# Altium PCB PCB1.PcbDoc
Units mm, origin at the board's own origin, x right, y up, seen from the top; angles counter-clockwise.
Board outline 24.26 x 18.8 mm, 2 copper layers (Top Layer, Bottom Layer); 19 components, 11 nets, 52 pads, 13 vias.
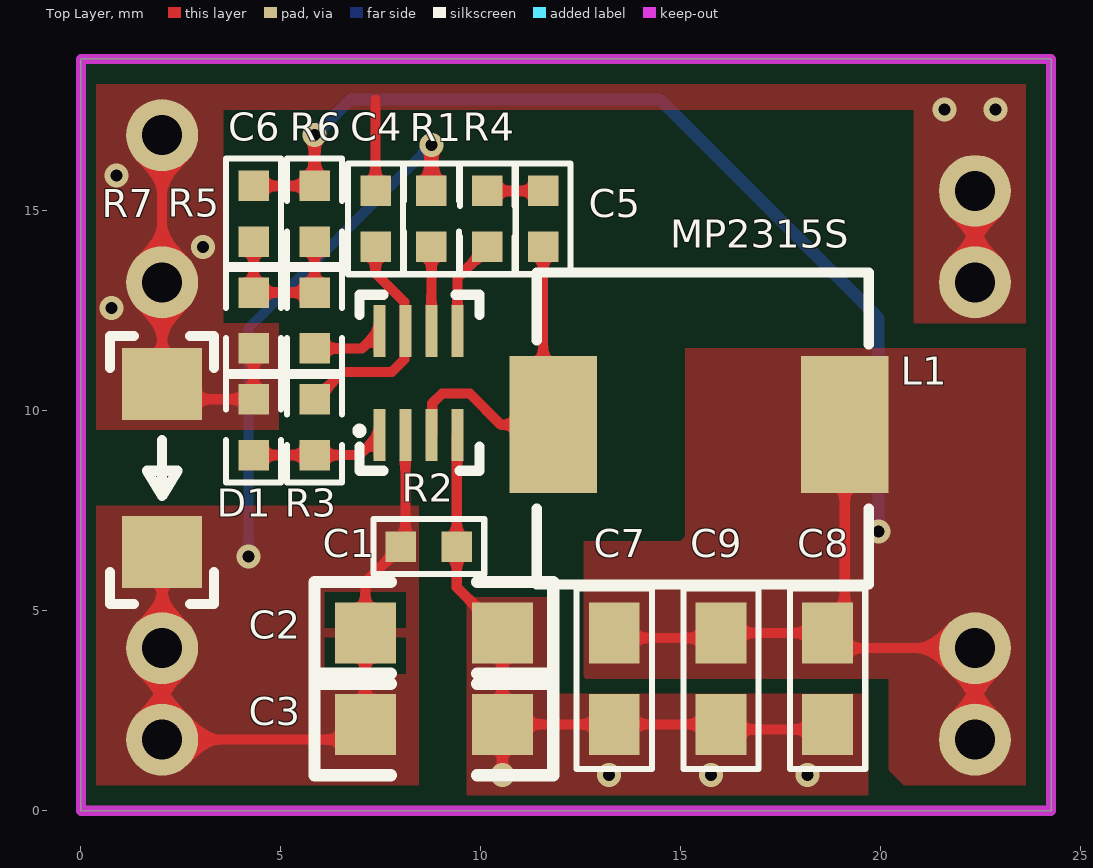
[diagram p0: Top Layer view]
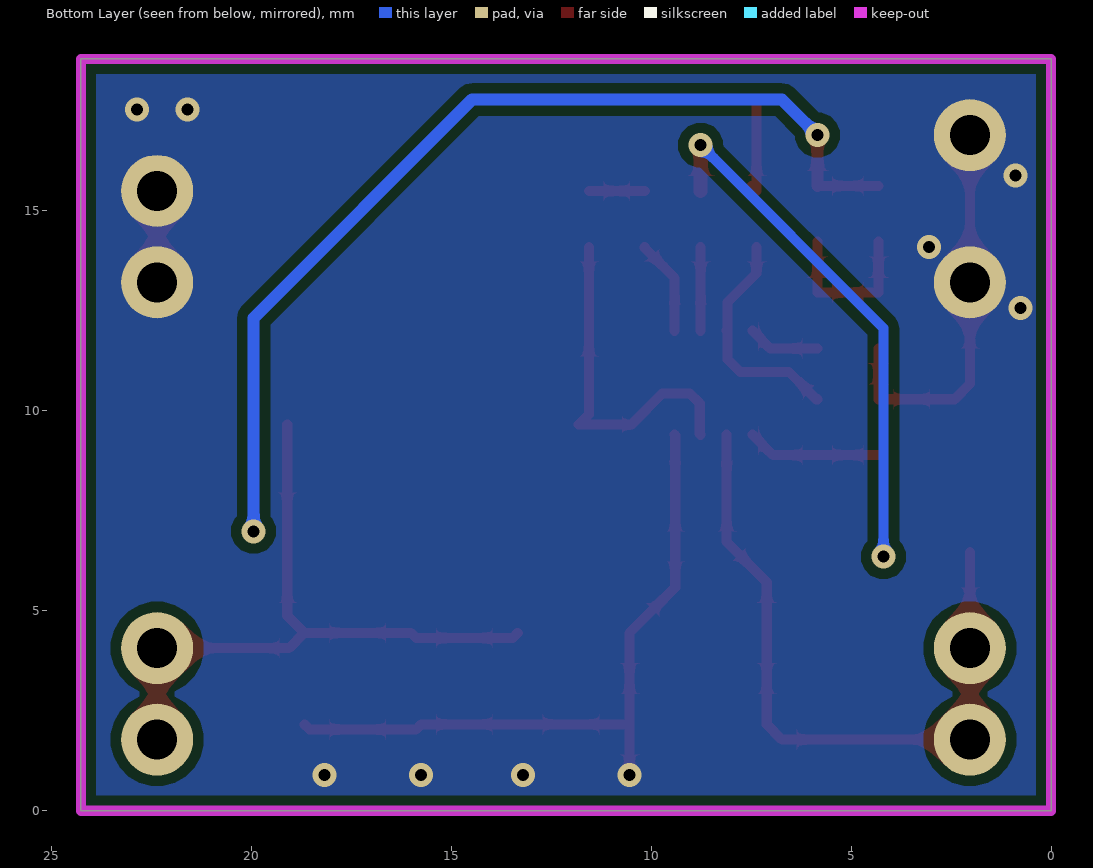
[diagram p1: Bottom Layer view, seen from below]
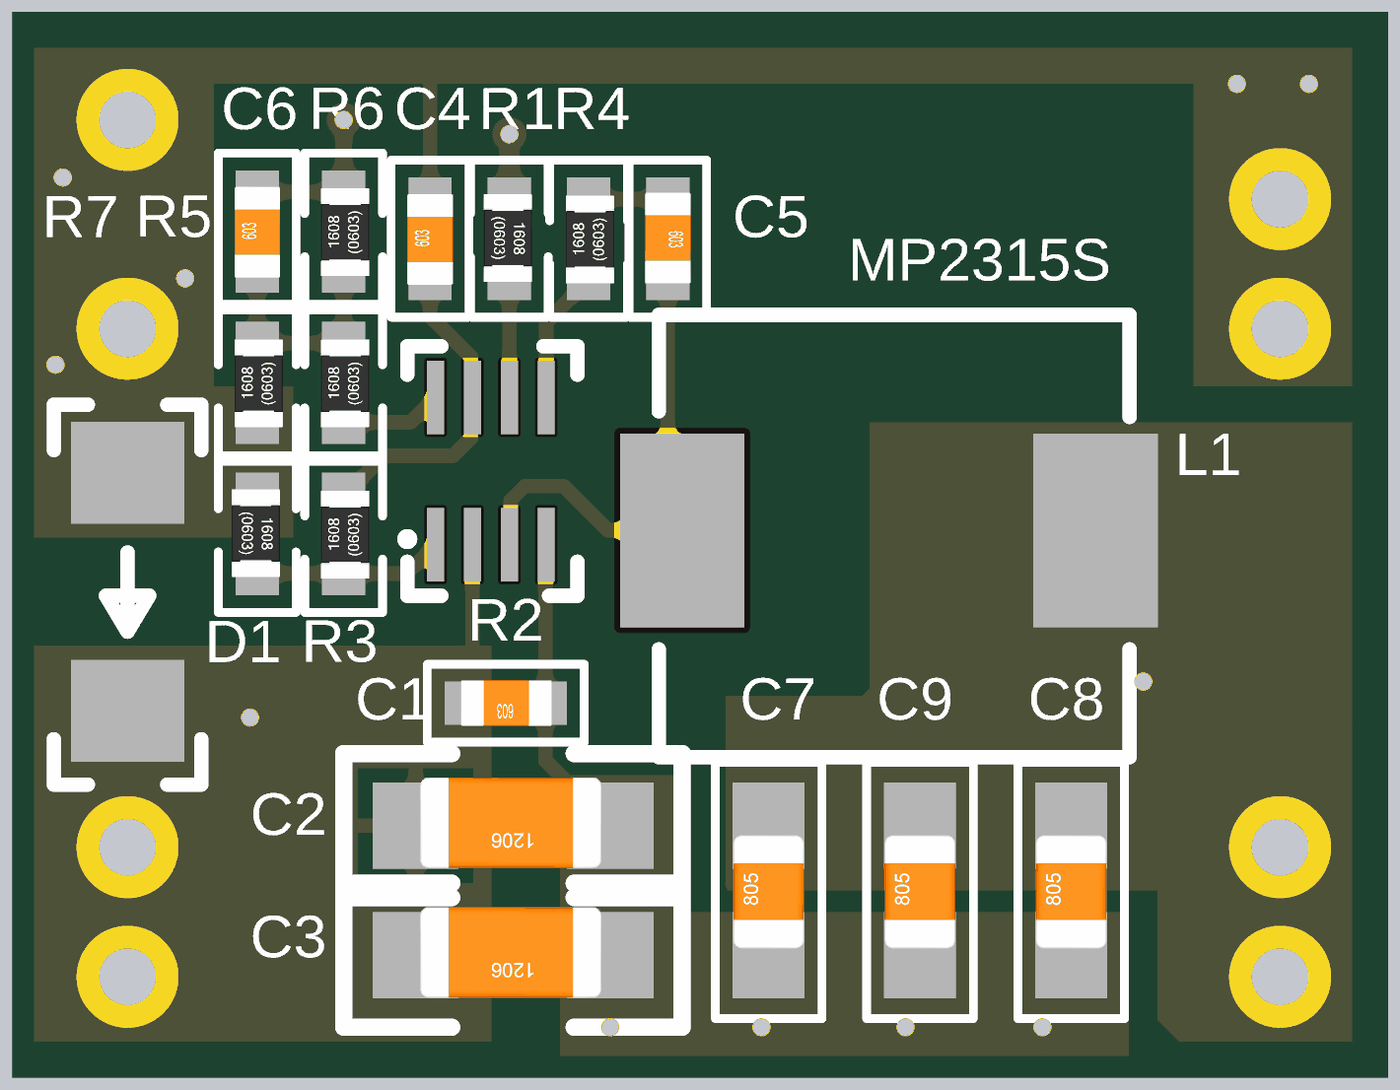
[diagram p2: 3D render of the assembled board from above, using the file's embedded part models]

## Layer stack, top to bottom
Top Solder: solder mask 0.0102, Solder Resist, Dk 3.5
Top Layer: signal copper 0.0356
Dielectric 1: dielectric 0.32, FR-4, Dk 4.8
Bottom Layer: signal copper 0.0356
Bottom Solder: solder mask 0.0102, Solder Resist, Dk 3.5

## Board outline
0,0 24.257,0 24.257,18.796 0,18.796

## Design rules (kind name [scope] priority, off if disabled: settings)
Clearance Clearance_1 [All] p1: gap=0.254 ignorepadtopadclearanceinfootprint=FALSE except(0: Arc-Hole Track-Hole SMDPad-Hole THPad-Hole Via-Hole Fill-Hole Poly-Hole Region-Hole Text-Hole)
Clearance [All] p2: gap=0 ignorepadtopadclearanceinfootprint=TRUE
PolygonConnect [All] p1: connectstyle=Direct reliefconductorwidth=0.254 reliefentries=4 polygonreliefangle="90 Angle" airgapwidth=0.254
RoutingVias [All] p1: holewidth=0.711 width=1.27 viastyle="Through Hole" minholewidth=0.711 minwidth=1.27 maxholewidth=0.711 maxwidth=1.27
SolderMaskExpansion [IsVia] p1: expansion=0.102 istentingtop=TRUE
Width [All] p1: maxlimit=0.4 minlimit=0.254 preferedwidth=0.254
30 further rules are at their usual default settings.

## Components (designator, comment, footprint, x,y, rotation, side; value= is the part's Value field where it differs from the comment)
C1 "0.1uf" 0603C 9.398,6.604 r180 top
C2 "22uf" 1206C 10.541,4.445 r180 top
C3 "N/A" 1206C 10.541,2.159 r180 top
C4 "0.1uf" 0603C 7.366,14.097 r90 top
C5 "0.1uf" 0603C 11.557,15.494 r270 top
C6 "33pf" 0603C 4.318,14.224 r90 top
C7 "22uf" 0805c 13.335,2.159 r90 top
C8 "22uf" 0805c 18.669,2.159 r90 top
C9 "N/A" 0805c 16.002,2.159 r90 top
D1 "SMAJ12A" SMA 2.032,6.468 r90 top
L1 "4.9uH" L_pcb 19.097,9.652 r180 top
MP2315S "MP2315S" MP2315_PCB 7.463,11.998 r0 top
R1 "300K" 0603R 8.763,15.494 r270 top
R2 "100K" 0603R 5.842,8.89 r90 top
R3 "9.09K" 0603R 4.318,10.287 r270 top
R4 "10R" 0603R 10.16,14.097 r90 top
R5 "20K" 0603R 5.842,11.557 r90 top
R6 "40.2K" 0603R 5.842,14.224 r90 top
R7 "7.5K" 0603R 4.318,11.557 r90 top

## Footprints (in the part's own frame and the unit in brackets; to place one, negate y for a bottom-side part, rotate by r counter-clockwise, add the part's x,y. Pads: shape width x height; smd on the part's side, far side on the other; paste and mask are expansions set on the pad)
0603C [mil]
  rect 30x30 smd: 1(0,0) 2(55,0)
  silkscreen extent -27,-27 82,27, body extent -4,-16 59,16, height 12
0603R [mil]
  rect 30x30 smd: 1(0,0) 2(55,0)
  silkscreen extent -27,-27 82,27, body extent -4,-18 58,16, height 18
0805c [mil]
  rect 60x50 smd: 1(0,0) 2(90,0)
  silkscreen extent -44,-37 134,37, body extent 5,-25 83,25, height 31
1206C [mil]
  rect 60x60 smd: 1(0,0) 2(135,0)
  silkscreen extent -50,-50 185,50, body extent 6,-33 132,30, height 40
L_pcb [mm]
  rect 2.194x3.42 smd mask+0.102: 1(7.286,0)
  rect 2.194x3.42 smd: 2(0,0)
  silkscreen extent -0.6,-3.8 7.7,4
MP2315_PCB [mm]
  rect 0.3x1.3 smd mask+0.05: 1(0,-2.6) 2(0.65,-2.6) 3(1.3,-2.6) 4(1.95,-2.6) 5(1.95,0) 6(1.3,0) 7(0.65,0) 8(0,0)
  silkscreen extent -0.55,-3.5 2.5,0.9
SMA [mm]
  rect 1.8x2 smd: 1(4.2,0) 2(0,0)
  silkscreen extent -1.3,-1.3 5.4,1.3

## Part data
C1 C2 C3 C4 C5 C6 C7 C8 C9: library part capacitor
D1: library part D
L1: library part inductance
R1 R2 R3 R4 R5 R6 R7: library part resistance

## Free pads (board coordinates)
  round 1.8 hole 1: 1(2.032,1.778) 2(22.352,15.494) 3(22.352,1.778) 4(2.032,16.891) 5(2.032,4.064) 6(22.352,4.064) 7(22.352,13.208) 8(2.032,13.208)

## Via types
v1: diameter 0.6, hole 0.3, Top Layer to Bottom Layer, tented both sides, 13 vias

## Nets (pads, with @x,y where several pads share a name; then routed paths per layer and width w, separated by ;. In a path a pad name is that pad's centre, name@x,y a point inside that pad or via, vN(x,y) a via of type N, cw(c..) or ccw(c..) an arc to the next point about the centre after c; other vN are vias at no path point)
+5V: C6.2 C7.2 C8.2 C9.2 L1.2 pad.3 pad.6 R6.2 | length 41.8
  Top Layer w0.254: C6.2 R6.2 ; C7.2 13.462,4.318 15.875,4.318 C9.2 C8.2 ; L1.2 19.097,4.873 C8.2 ; pad.3 pad.6 19.05,4.064 C8.2
  Top Layer w0.3: R6.2 v1(5.842,16.891)
  Bottom Layer w0.3: v1(5.842,16.891) 6.731,17.78 14.478,17.78 19.939,12.319 v1(19.939,6.985)
+12V: C1.2 C2.2 C3.2 D1.2 MP2315S.2 pad.1 pad.5 R1.1 | length 30.9
  Top Layer w0.254: D1.2 pad.5 pad.1 6.731,1.778 C3.2 C2.2 7.112,5.715 8.113,6.716 MP2315S.2
  Top Layer w0.35: R1.1 v1(8.763,16.637)
  Bottom Layer w0.254: v1(4.191,6.35) 4.191,12.065 v1(8.763,16.637)
GND: C1.1 C2.1 C3.1 C4.2 C7.1 C8.1 C9.1 D1.1 MP2315S.4 pad.2 pad.4 pad.7 pad.8 R3.1 R7.1 | length 31.9
  Top Layer w0.254: pad.4 pad.8 D1.1 2.413,10.287 R3.1 R7.1 ; 7.366,17.78 C4.2 C4.2@7.493,15.621 ; MP2315S.4 9.398,9.383 C1.1 9.398,5.588 C2.1 C3.1 ; v1(10.541,0.889) C3.1 ; C8.1 18.542,2.032 15.875,2.032 15.748,2.159 C7.1 C3.1 ; pad.7 pad.2
  other v1: 13.208,0.889 15.748,0.889 18.161,0.889 0.762,12.573 3.048,14.097 0.889,15.875 21.59,17.526 22.86,17.526
NetC4_1: C4.1 MP2315S.7 R2.2 | length 5.8
  Top Layer w0.254: R2.2 5.873,10.287 6.553,10.967 7.771,10.967 8.09,11.286 8.09,11.975 MP2315S.7 8.09,12.021 8.09,12.71 7.366,13.434 C4.1
NetC5_1: C5.1 R4.2 | length 1.4
  Top Layer w0.254: R4.2 C5.1
NetC5_2: C5.2 L1.1 MP2315S.3 | length 8.8
  Top Layer w0.254: MP2315S.3 8.786,9.421 8.786,10.183 9.032,10.429 9.721,10.429 10.498,9.652 L1.1 11.557,9.906 C5.2
NetC6_1: C6.1 R5.2 R6.1 R7.2 | length 4.1
  Top Layer w0.254: C6.1 R7.2 R5.2 R6.1
NetMP2315S_1: MP2315S.1 R2.1 R3.2 | length 3.4
  Top Layer w0.254: R3.2 R2.1 6.955,8.89 MP2315S.1
NetMP2315S_5: MP2315S.5 R4.1 | length 2.4
  Top Layer w0.254: MP2315S.5 9.413,13.319 10.16,14.066 R4.1
NetMP2315S_6: MP2315S.6 R1.2 | length 2.1
  Top Layer w0.254: MP2315S.6 R1.2
NetMP2315S_8: MP2315S.8 R5.1 | length 1.8
  Top Layer w0.254: R5.1 7.022,11.557 MP2315S.8

## Polygon pours and split planes (outlines as drawn)
+12V on Top Layer "+12V_L01_P006" (solid, pour order 6): 0.381,7.62 8.445,7.62 8.445,0.635 0.381,0.635
GND on Top Layer "GND_L01_P008" (solid, remove dead copper, pour order 8): 9.652,5.334 11.684,5.334 11.684,2.921 19.685,2.921 19.685,0.381 9.652,0.381
+5V on Top Layer "+5V_L01_P009" (solid, pour order 9): 15.113,11.557 23.622,11.557 23.622,0.635 20.574,0.635 20.193,1.016 20.193,3.302 12.446,3.302 12.573,3.429 12.573,6.731 14.986,6.731 15.113,6.858
GND on Top Layer "GND_L01_P010" (solid, pour order 10): 0.381,9.525 4.953,9.525 4.953,12.192 3.556,12.192 3.556,17.526 20.828,17.526 20.828,12.192 23.622,12.192 23.622,18.161 0.381,18.161
GND on Bottom Layer "GND_L02_P011" (solid, pour order 11): 0,18.796 24.257,18.796 24.257,0 0,0

## Keep-outs
Keep-Out Layer:
  the board outline again, w0.254

## Silkscreen, mask and mechanical layers (free items; w line width, h text height)
Mechanical 1:
  the board outline again, w0.254
Drill Drawing:
  text ".legend" at 28.829,9.29 h1.2